# Allegro board PATTERNDESIGN01.brd
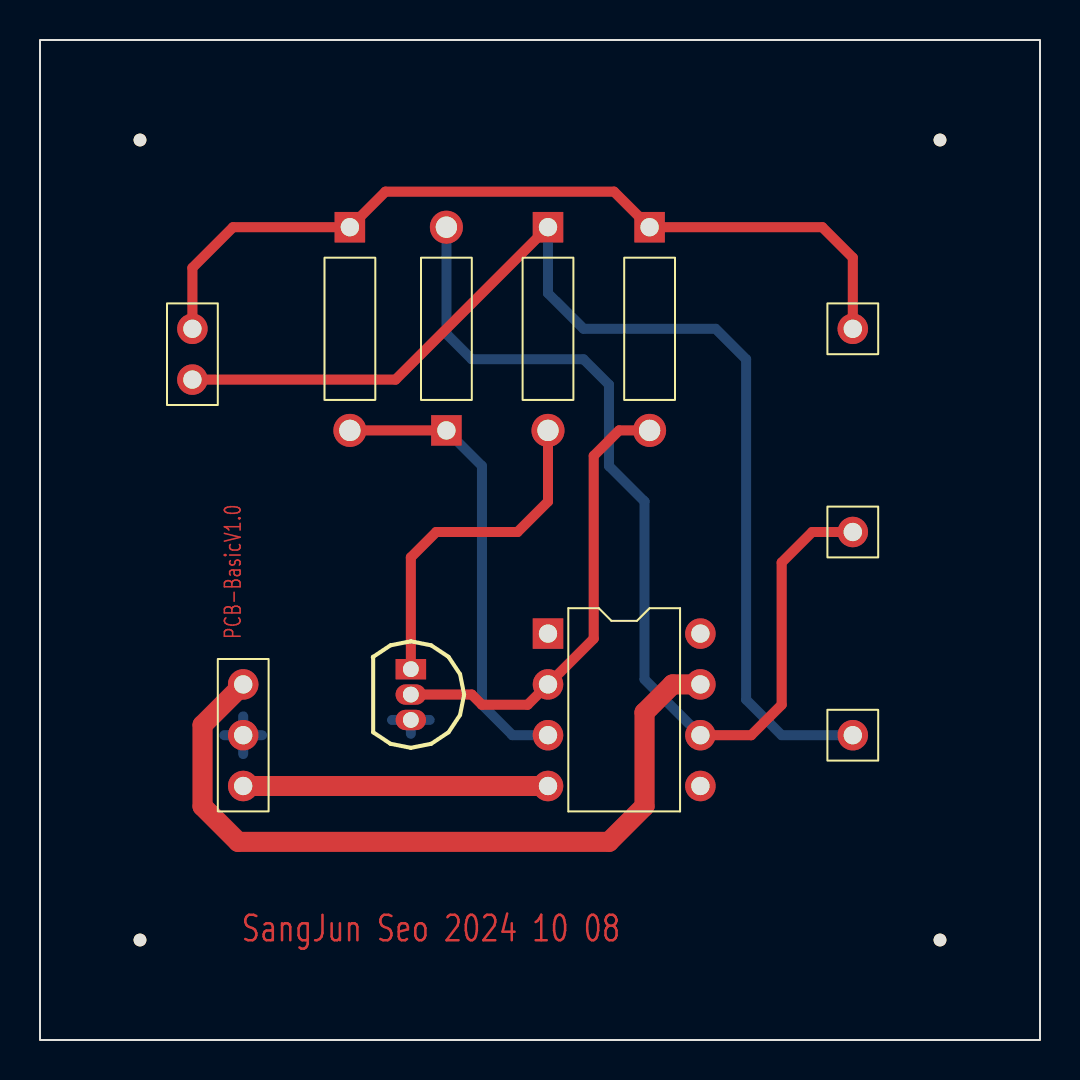
[diagram p0: board, top side]
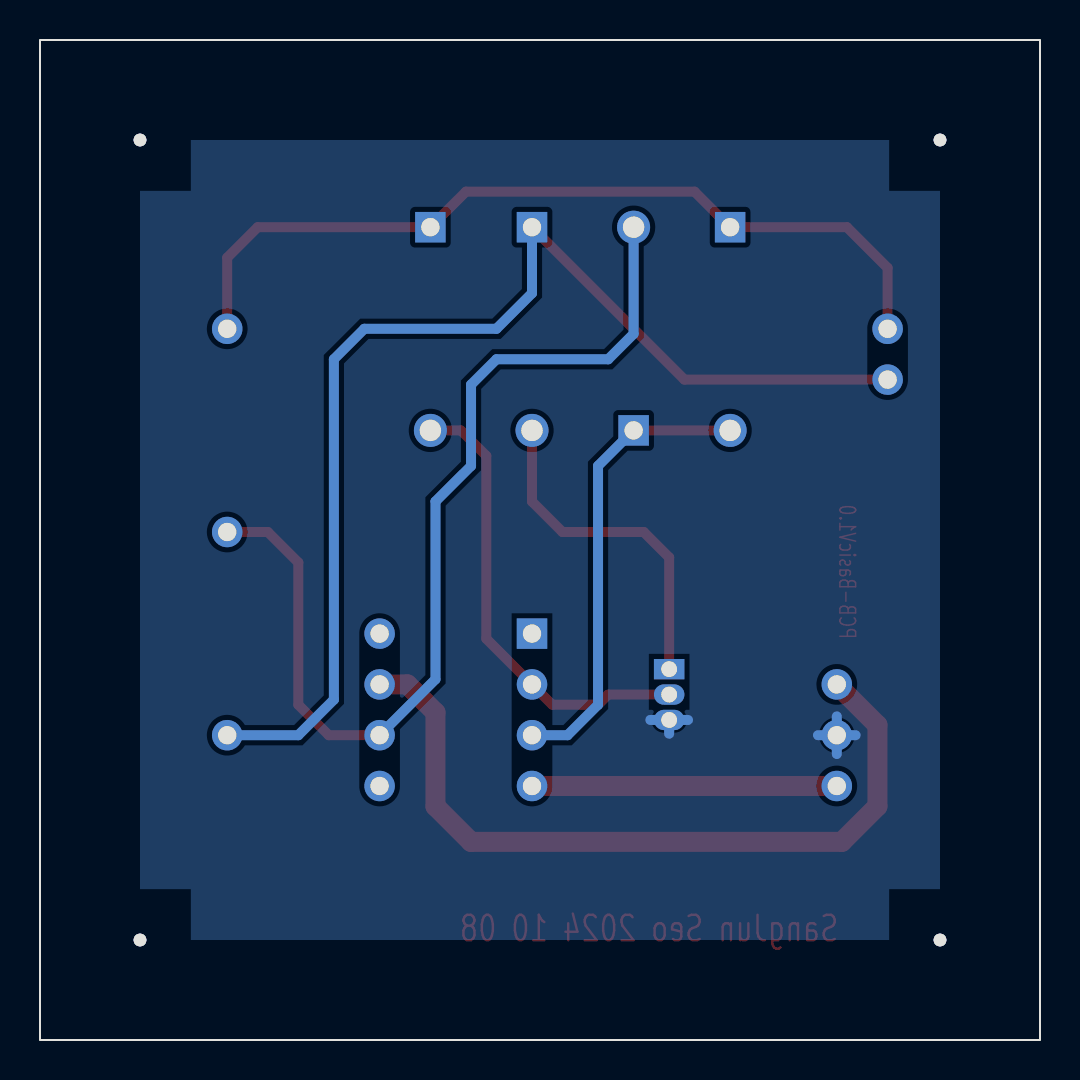
[diagram p1: board, bottom side, seen from below]

Outline 50 x 50 mm; copper layers: TOP, BOTTOM. Coordinates in mm from the lower left corner of the outline.
Outline path: rectangle 0,0 50,50

## Design rules (mm)
constraint set DEFAULT: min track width 0.5
nets with their own width: min track width 1; nets +12V -12V GND

## Placement (name value [footprint] x y rotation side)
J1  CON2  [JUMPER2]  7.62 33.02 90 top
J2  CON3  [JUMPER3]  10.16 17.78 270 top
NOREF  -  [unnamed]  5 5 0 top
NOREF#2  -  [#2]  45 0 90 top
NOREF#3  -  [unnamed]  5 45 0 top
NOREF#4  -  [#2]  0 50 0 top
NOREF#5  -  [unnamed]  45 5 0 top
NOREF#6  -  [#2]  50 0 90 top
NOREF#7  -  [#2]  45 5 0 top
NOREF#8  -  [unnamed]  45 45 0 top
Q1  NPN BCE  [TO92]  18.54 18.54 270 top
R1  R  [RES400]  20.32 30.48 0 top
R2  R  [RES400]  15.49 40.64 180 top
R3  R  [RES400]  30.48 40.64 180 top
R4  R  [RES400]  25.4 40.64 180 top
TP1  V_Sin  [JUMPER1]  40.64 35.56 0 top
TP2  AM_Wave  [JUMPER1]  40.64 25.4 0 top
TP3  V_Pulse  [JUMPER1]  40.64 15.24 0 top
U1  LF356  [DIP8_3]  25.4 20.32 0 top

## Library data of the parts
J1 = CON2: User Part Number: ***
J2 = CON3: User Part Number: ***
Q1 = NPN BCE
R1-R4 = R: Tolerance: ***; User Part Number: ***
TP1-TP3 = TEST POINT: User Part Number: ***
U1 = LF356: Tolerance: ***; User Part Number: ***

## Footprints (pads in the part's own frame, mm; a bottom-side part is the same pattern mirrored in y, then rotated)
DIP8_3
  rect 1.524x1.524 hole 0.914: 1(0,0)
  round 1.524 hole 0.914: 2(0,-2.54) 3(0,-5.08) 4(0,-7.62) 5(7.62,-7.62) 6(7.62,-5.08) 7(7.62,-2.54) 8(7.62,0)
JUMPER1
  round 1.524 hole 0.914: 1(0,0)
JUMPER2
  round 1.524 hole 0.914: 1(0,0) 2(2.54,0)
JUMPER3
  round 1.524 hole 0.914: 1(0,0) 2(2.54,0) 3(5.08,0)
RES400
  rect 1.524x1.524 hole 0.914: 1(0,0)
  round 1.651 hole 1.067: 2(0,10.16)
TO92
  rect 1.016x1.524 hole 0.787: 1(0,0)
  oval 1.016x1.524 hole 0.787: 2(1.27,0) 3(2.54,0)
unnamed
  round 0.635 hole 3.175 unplated: (0,0)

## Nets
+12V: J2.1 U1.7
-12V: J2.3 U1.4(V-)
GND: J2.2 Q1.3(E)
AM_WAVE: R1.2 TP2.1 U1.6
N00290: J1.2 R2.1 R3.1 TP1.1
N00294: J1.1 R4.1 TP3.1
N00334: Q1.2 R3.2 U1.2
N00338: R1.1 R2.2 U1.3
N000841: Q1.1 R4.2

Pads without a net: U1 1 5 8

## Routing (per net, layer and track width the routed paths; a pad name or vN(x,y) marks a point on that pad's centre or on a via; arc(x,y) is an arc through that point)
+12V: length 38.6
  TOP w1: U1.7 31.63,17.78 30.23,16.38 30.23,11.68 28.45,9.91 9.91,9.91 8.13,11.68 8.13,15.75 J2.1
-12V: length 15.2
  TOP w1: J2.3 U1.4
GND: length 6.3
  BOTTOM w0.5: Q1.3 19.48,16 ; Q1.3 18.54,15.31 ; Q1.3 17.6,16 ; 9.22,15.24 J2.2 ; J2.2 10.16,14.3 ; J2.2 10.16,16.18 ; J2.2 11.1,15.24
AM_WAVE: length 49.9
  TOP w0.5: TP2.1 38.61,25.4 37.08,23.88 37.08,16.76 35.56,15.24 U1.6
  BOTTOM w0.5: U1.6 30.23,18.03 30.23,26.92 28.45,28.7 28.45,32.77 27.18,34.04 21.59,34.04 20.32,35.31 R1.2
N00290: length 42.6
  TOP w0.5: TP1.1 40.64,39.12 39.12,40.64 R3.1 28.7,42.42 17.27,42.42 R2.1 9.65,40.64 7.62,38.61 J1.2
N00294: length 58.6
  TOP w0.5: R4.1 17.78,33.02 J1.1
  BOTTOM w0.5: R4.1 25.4,37.34 27.18,35.56 33.78,35.56 35.31,34.04 35.31,17.02 37.08,15.24 TP3.1
N00334: length 23.2
  TOP w0.5: Q1.2 21.59,17.27 22.1,16.76 24.38,16.76 U1.2 27.69,20.07 27.69,29.21 28.96,30.48 R3.2
N00338: length 23.2
  TOP w0.5: R2.2 R1.1
  BOTTOM w0.5: U1.3 23.62,15.24 22.1,16.76 22.1,28.7 R1.1
N000841: length 17.2
  TOP w0.5: R4.2 25.4,26.92 23.88,25.4 19.81,25.4 18.54,24.13 Q1.1

## Copper pours and planes (outline as drawn; the poured copper is in the pictures)
GND on BOTTOM: 5,45 5,5 45,5 45,45

## Text on the board
TOP: PCB-BasicV1.0 | SangJun Seo 2024 10 08
DIMENSION: FIGURE | FINISHED_SIZE | 0.787 | 0.914 | 1.067 | 3.175 | DRILL CHART: TOP to BOTTOM | ALL UNITS ARE IN MILLIMETERS | PLATED | NON-PLATED | QTY | 3 | 16 | 8 | 4
